# Altium PCB science_board_25.PcbDoc (part 1 of 2)
Units mil, origin at the board's own origin, x right, y up, seen from the top; angles counter-clockwise.
Board outline 2750 x 2600 mil, 2 copper layers (Top Layer, Bottom Layer); 141 components, 77 nets, 416 pads, 107 vias.
Unrouted connection lines stored in the file: 96.
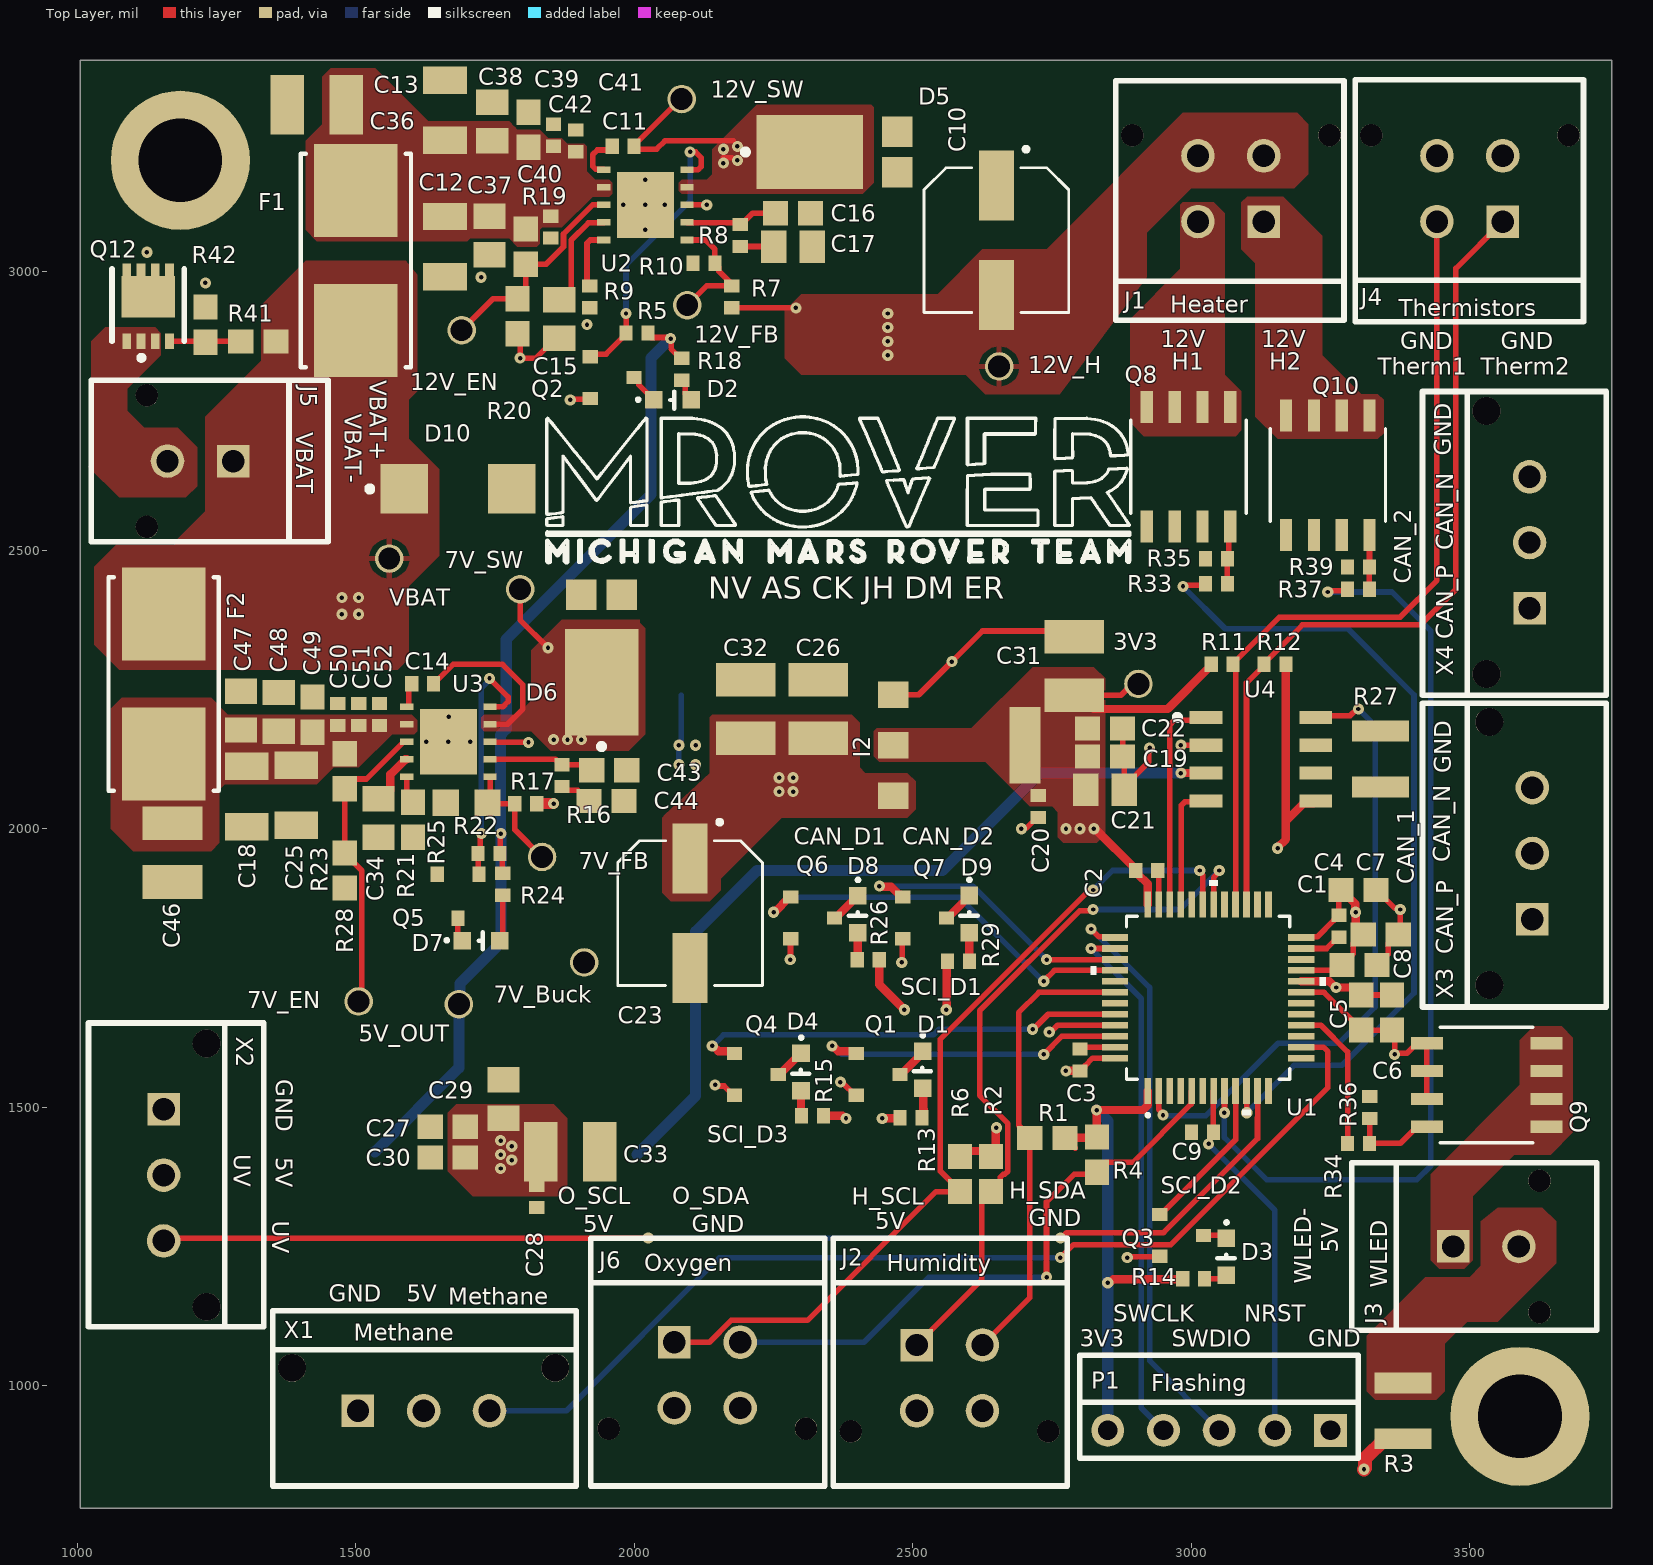
[diagram p0: Top Layer view]
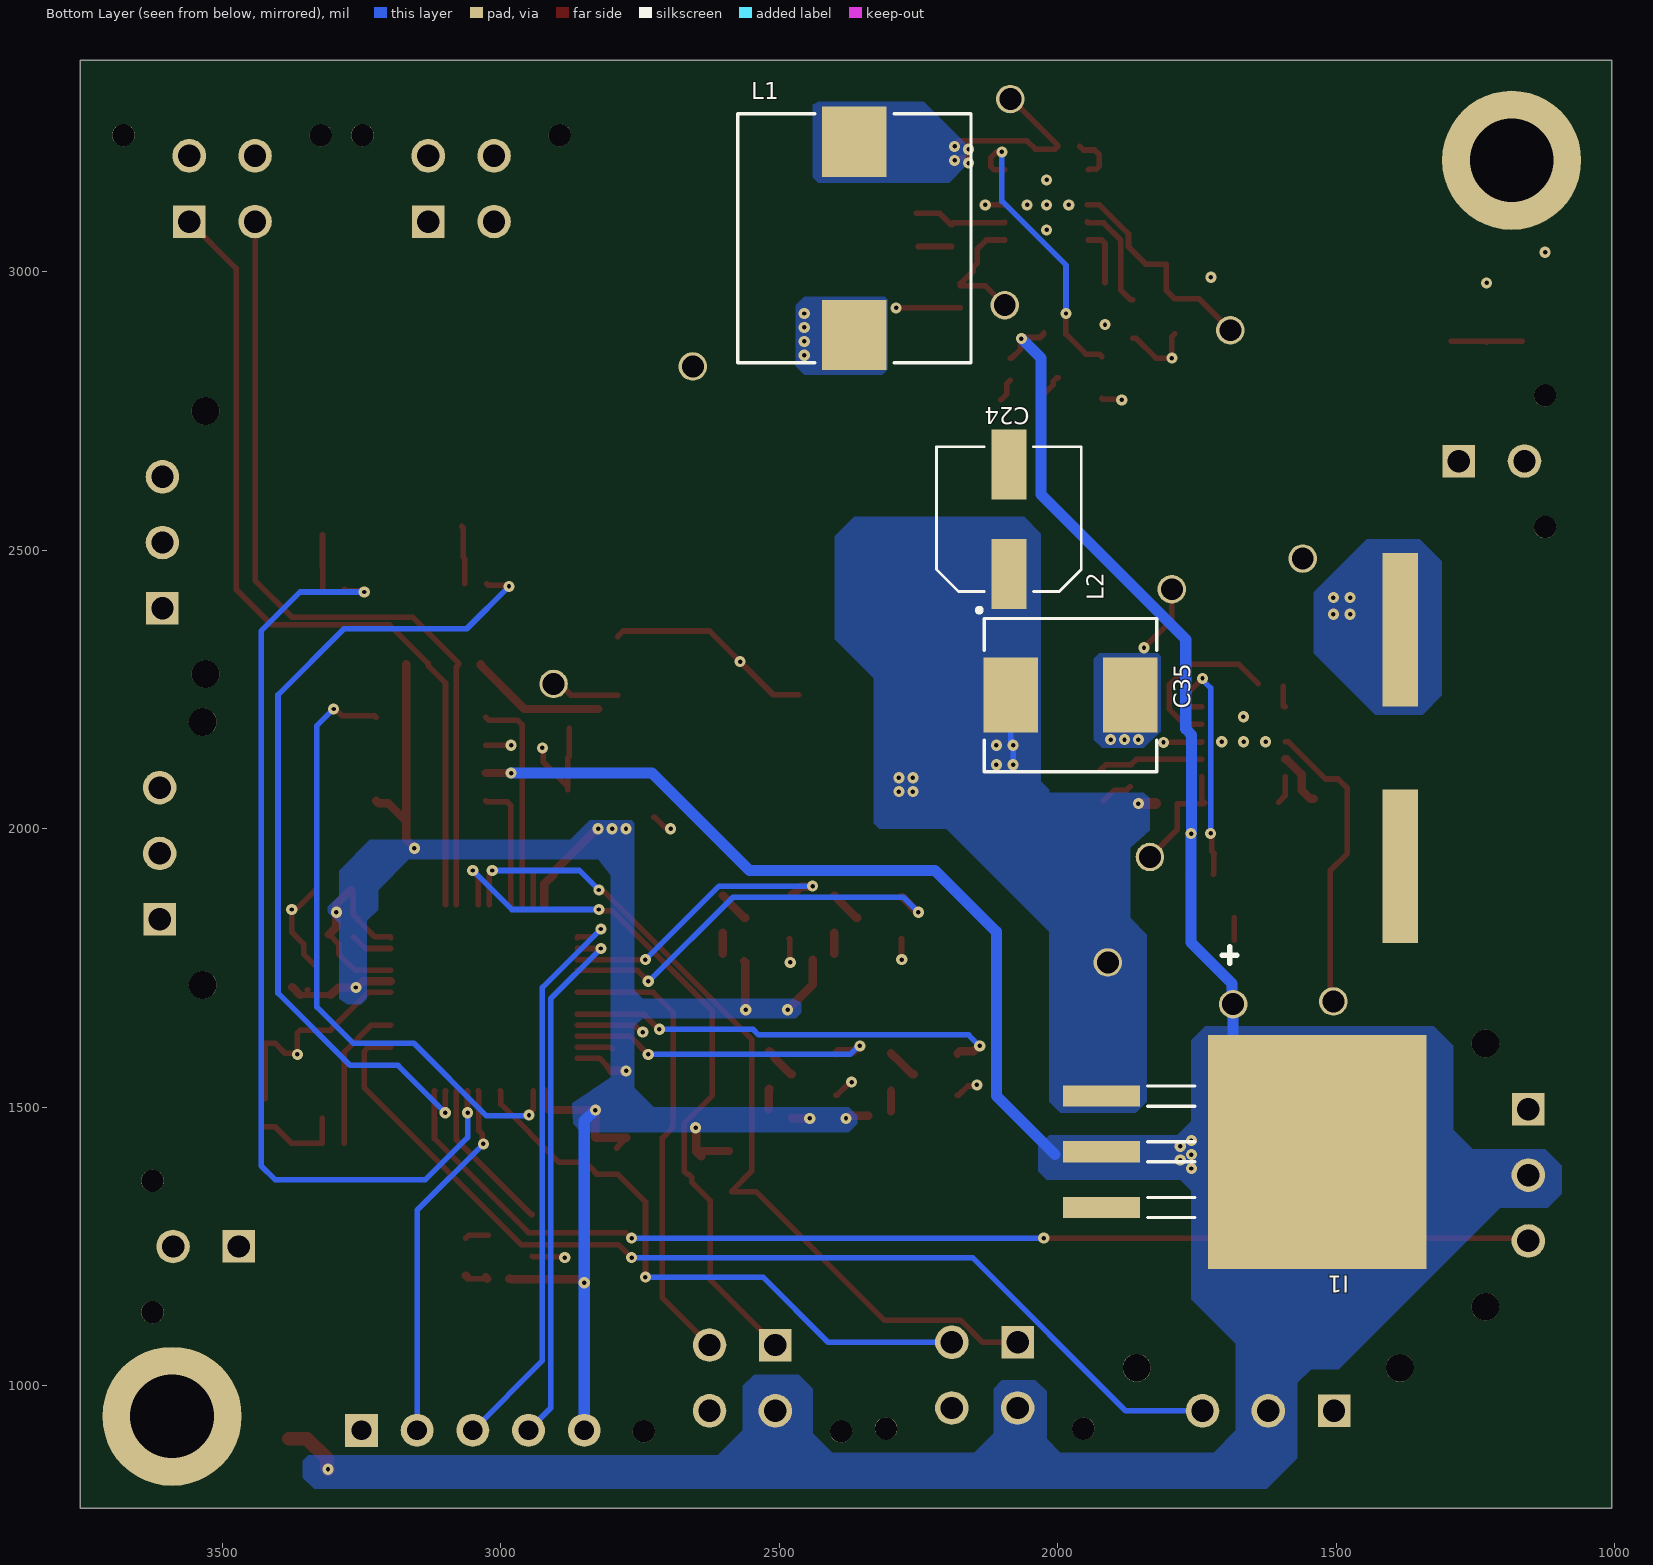
[diagram p1: Bottom Layer view, seen from below]

## Layer stack, top to bottom
Top Solder: solder mask 0.4, Solder Resist, Dk 3.5
Top Layer: signal copper 1.4
Dielectric 1: dielectric 12.6, FR-4, Dk 4.8
Bottom Layer: signal copper 1.4
Bottom Solder: solder mask 0.4, Solder Resist, Dk 3.5

## Board outline
1005,780 1005,3380 3755,3380 3755,780

## Design rules (kind name [scope] priority, off if disabled: settings)
BoardOutlineClearance [All] p1: gap=7.87 ignorepadtopadclearanceinfootprint=FALSE
Clearance [All] p1: gap=4 ignorepadtopadclearanceinfootprint=FALSE except(5: Arc-Via Track-Via SMDPad-Via THPad-Via Via-Via Via-Fill Via-Poly Via-Region Via-Text; 9.84: Arc-Hole Track-Hole SMDPad-Hole THPad-Hole Via-Hole Fill-Hole Poly-Hole Region-Hole Text-Hole)
ComponentClearance [All] p1: gap=4 collisioncheckmode=3 verticalgap=4 showdistances=TRUE
DiffPairsRouting DiffPairsRouting_1 [InDifferentialPair ('CAN')] p1: maxlimit=10 minlimit=10 mostfreqgap=10 toplayer_minwidth=15 toplayer_maxwidth=15 toplayer_prefwidth=15 bottomlayer_minwidth=15 bottomlayer_maxwidth=15 bottomlayer_prefwidth=15 maxuncoupledlength=500
DiffPairsRouting [All] p2: maxlimit=4 minlimit=4 mostfreqgap=4 toplayer_minwidth=4 toplayer_maxwidth=71497.94 toplayer_prefwidth=4 bottomlayer_minwidth=4 bottomlayer_maxwidth=71497.94 bottomlayer_prefwidth=4 maxuncoupledlength=500
Height [All] p1: minheight=0 maxheight=71497.94 prefheight=500
HoleSize [All] p1: absolutevalues=TRUE maxlimit=248.03 minlimit=7.87 maxpercent=80.000 minpercent=20.000
HoleToHoleClearance [All] p1: gap=9.84 allowstackedmicrovias=FALSE
MatchedLengths [InDifferentialPair ('CAN')] p1: tolerance=1000 checknetsindiffpair=FALSE checkdiffpairvsdiffpair=TRUE checkxsignals=TRUE checkothers=TRUE
MinimumAnnularRing [All] p1: minimumring=3
MinimumSolderMaskSliver [All] p1: minsoldermaskwidth=0
PlaneClearance [All] p1: clearance=4
PlaneConnect PlaneConnectPowerPads [InPadClass('PowerPads')] p1: planeconnectstyle=Direct reliefexpansion=20 reliefentries=4 reliefconductorwidth=10 reliefairgap=10
PlaneConnect [All] p2: pad.planeconnectstyle=Relief pad.reliefexpansion=11.81 pad.reliefentries=4 pad.reliefconductorwidth=4 pad.reliefairgap=4 via.planeconnectstyle=Direct via.reliefexpansion=11.81 via.reliefentries=4 via.reliefconductorwidth=5 via.reliefairgap=5
PolygonConnect PolygonConnectPowerPads [All vs (InPadClass('PowerPads'))] p1: connectstyle=Direct reliefconductorwidth=10 reliefentries=4 polygonreliefangle="90 Angle" airgapwidth=10
PolygonConnect [All] p2: connectstyle=Direct reliefconductorwidth=4 reliefentries=4 polygonreliefangle="90 Angle" airgapwidth=4
RoutingVias [All] p1: holewidth=7.87 width=17.72 viastyle="Through Hole" minholewidth=7.87 minwidth=17.72 maxholewidth=248.03 maxwidth=257.87
SilkToSilkClearance [All] p1: silktosilkclearance=0
SilkToSolderMaskClearance [IsPad] p1: minsilkscreentomaskgap=4 clearancetoexposedcopper=TRUE
SolderMaskExpansion [All] p1: expansion=2.95 istentingtop=FALSE
SupplyNets "Schematic Supply Nets_11" [InNet('12V_HEATER')] p1: voltage=0.000
SupplyNets "Schematic Supply Nets_10" [InNet('VBAT_LDOS')] p2: voltage=0.000
SupplyNets "Schematic Supply Nets_9" [InNet('5V')] p3: voltage=0.000
SupplyNets "Schematic Supply Nets_8" [InNet('VBAT_12V')] p4: voltage=0.000
SupplyNets "Schematic Supply Nets_7" [InNet('7V_BUCK')] p5: voltage=0.000
SupplyNets "Schematic Supply Nets_6" [InNet('12V_HEATER')] p6: voltage=0.000
SupplyNets "Schematic Supply Nets_5" [InNet('3V3')] p7: voltage=0.000
SupplyNets "Schematic Supply Nets_4" [InNet('GND')] p8: voltage=0.000
SupplyNets "Schematic Supply Nets_3" [InNet('3V3_OUT')] p9: voltage=0.000
SupplyNets "Schematic Supply Nets_2" [InNet('5V')] p10: voltage=0.000
SupplyNets "Schematic Supply Nets_1" [InNet('VBAT')] p11: voltage=0.000
SupplyNets "Schematic Supply Nets" [InNet('5V_OUT')] p12: voltage=0.000
Width [All] p1: maxlimit=71497.94 minlimit=4 preferedwidth=4
20 further rules are at their usual default settings.

## Classes and differential pairs
component class U_MCU_breakout: C1 C2 C3 C4 C5 C6 C7 C8 C9 P1 R1 R2 R4 R6 U1
component class U_Input_Power: C35 C36 C37 C38 C39 C40 C41 C42 C46 C47 C48 C49 C50 C51 C52 D10 F1 F2 J5 Q12 R41 R42 TP11
component class U_Headers: J1 J2 J3 J4 J6 Q8 Q9 Q10 R3 R11 R12 R33 R34 R35 R36 R37 R39 X1 X2
component class U_CAN_Transceiver: D1 D3 D4 D8 D9 Q1 Q3 Q4 Q6 Q7 R13 R14 R15 R26 R27 R29 U4 X3 X4
component class U_12V_Buck_Motor: C10 C11 C12 C13 C15 C16 C17 D2 D5 L1 Q2 R5 R7 R8 R9 R10 R18 R19 R20 TP1 TP2 TP3 TP4 U2
component class U_7V_5V_3V3_Bucks: C14 C18 C19 C20 C21 C22 C23 C24 C25 C26 C27 C28 C29 C30 C31 C32 C33 C34 C43 C44 D6 D7 I1 I2 L2 Q5 R16 R17 R21 R22 R23 R24 R25 R28 TP5 TP6 TP7 TP8 TP9 TP10 U3
differential pair CAN: +CAN_P -CAN_N

## Components (designator, comment, footprint, x,y, rotation, side; value= is the part's Value field where it differs from the comment)
3V3 "5003" TEST-POINT-0001 2905,2260 r0 top (schematic designator TP7)
5V_OUT "5003" TEST-POINT-0001 1685,1685 r0 top (schematic designator TP6)
7V_Buck "5003" TEST-POINT-0001 1910,1760 r0 top (schematic designator TP5)
7V_EN "5003" TEST-POINT-0001 1505,1690 r0 top (schematic designator TP8)
7V_FB "5003" TEST-POINT-0001 1834.32,1949.28 r90 top (schematic designator TP10)
7V_SW "5003" TEST-POINT-0001 1795,2430 r0 top (schematic designator TP9)
12V_EN "5003" TEST-POINT-0001 1690,2895 r0 top (schematic designator TP2)
12V_FB "5003" TEST-POINT-0001 2095,2940 r0 top (schematic designator TP4)
12V_H "5003" TEST-POINT-0001 2655,2830 r0 top (schematic designator TP1)
12V_SW "5003" TEST-POINT-0001 2085,3310 r0 top (schematic designator TP3)
C1 "CC0402KRX7R7BB104" CAP-0402 3265,1825 r90 top
C2 "CC0402KRX7R7BB104" CAP-0402 2920,1925 r180 top
C3 "CC0402KRX7R7BB104" CAP-0402 2800,1585 r270 top
C4 "CC0603KRX5R8BB475" CAP-0603 3300,1890 r0 top
C5 "CC0603KPX7R9BB103" CAP-0603 3305,1670 r90 top
C6 "CC0603KRX7R7BB105" CAP-0603 3360,1670 r90 top
C7 "CC0603KPX7R9BB103" CAP-0603 3302.05,1755.47 r180 top
C8 "CC0603KRX7R7BB105" CAP-0603 3340,1810 r180 top
C9 "CC0402KRX7R7BB104" CAP-0402 3020,1455 r180 top
C10 "EEH-ZC1V470P" CAP-Radial-SMD 2650,3056.57 r270 top
C11 "CC0402KRX7R7BB104" CAP-0402 1980,3225 r0 top
C12 "CC1206KKX7R0BB225" CAP-1206 1660,3045 r90 top
C13 "CC1206KKX7R0BB225" CAP-1206 1660,3290 r270 top
C14 "CC0402KRX7R7BB104" CAP-0402 1620,2260 r0 top
C15 "GRM2165C1H272JA01D" CAP-0805 1865,2915 r90 top
C16 "CC0603CRNPO0BN6R8" CAP-0603 2285,3105 r180 top
C17 "CC0805JRNPO9BN471" CAP-0805 2285,3045 r180 top
C18 "CC1206KKX7R0BB225" CAP-1206 1304.28,2057.95 r90 top
C19 "CC0603KRX5R6BB106" CAP-0603 2845,2130 r180 top
C20 "CC0402KRX7R7BB104" CAP-0402 2725,2040 r90 top
C21 "CC0805JRNPO9BN471" CAP-0805 2845,2070 r180 top
C22 "CC0603KRX7R0BB104" CAP-0603 2845,2180 r180 top
C23 "EEH-ZC1V470P" CAP-Radial-SMD 2100,1848.43 r270 top
C24 "EEH-ZC1V470P" CAP-Radial-SMD 2087.6,2555.76 r90 bottom
C25 "CC1206KKX7R0BB225" CAP-1206 1392.92,2060.07 r90 top
C26 "293D106X9016A2TE3" CAP-1210 2330,2215 r270 top
C27 "CC0603KRX5R6BB106" CAP-0603 1665,1465 r0 top
C28 "CC0402KRX7R7BB104" CAP-0402 1825,1339.68 r90 top
C29 "CC0805JRNPO9BN471" CAP-0805 1765,1515 r270 top
C30 "CC0603KRX7R0BB104" CAP-0603 1665,1410 r0 top
C31 "293D106X9016A2TE3" CAP-1210 2790,2292.2 r270 top
C32 "293D106X9016A2TE3" CAP-1210 2200,2215 r270 top
C33 "293D106X9016A2TE3" CAP-1210 1885,1420 r180 top
C34 "GRM2165C1H272JA01D" CAP-0805 1540.5,2019.43 r90 top
C35 "100SEV100M12.5X16" ELEC-100U-0001 1385,2145 r0 bottom
C36 "CL32B106KBJNNNE" CAP-1210 1430,3300 r0 top
C37 "CC0805KKX7R9BB105" CAP-0805 1740,3065 r90 top
C38 "CC0805KRX7R9BB104" CAP-0805 1745,3270 r270 top
C39 "CC0603KPX7R9BB103" CAP-0603 1810,3255 r270 top
C40 "CC0402KRX7R9BB102" CAP-0402 1850,3080 r90 top
C41 "CC0402JRNPO9BN101" CAP-0402 1895,3235 r270 top
C42 "CC0402JRNPO9BN100" CAP-0402 1855,3245 r270 top
C43 "CC0603CRNPO0BN6R8" CAP-0603 1955,2105 r180 top
C44 "GRM1885C1H302JA01D" CAP-0603 1950,2050 r0 top
C46 "CL32B106KBJNNNE" CAP-1210 1170.94,1957.2 r90 top
C47 "CC0805KKX7R9BB105" CAP-0805 1293.84,2211.93 r270 top
C48 "CC0805KRX7R9BB104" CAP-0805 1361.62,2209.95 r270 top
C49 "CC0603KPX7R9BB103" CAP-0603 1422.12,2204.82 r270 top
C50 "CC0402KRX7R9BB102" CAP-0402 1467.46,2205.08 r270 top
C51 "CC0402JRNPO9BN101" CAP-0402 1504.92,2204.91 r270 top
C52 "CC0402JRNPO9BN100" CAP-0402 1542.39,2205.02 r270 top
D1 "BL-HKC36G-AV-TRB" LED-0603 2487.99,1623.95 r270 top
D2 "BL-HKC36G-AV-TRB" LED-0603 2011.81,2740.43 r0 top
D3 "BL-HKC36G-AV-TRB" LED-0603 3033.06,1288.19 r270 top
D4 "BL-HKC36G-AV-TRB" LED-0603 2269.67,1620.03 r270 top
D5 "PDS760-13" DO-POWERDI5 2359.33,3215 r180 top
D6 "PDS760-13" DO-POWERDI5 1941.22,2307.56 r270 top
D7 "BL-HKC36G-AV-TRB" LED-0603 1668.14,1769.69 r0 top
D8 "BL-HKC36G-AV-TRB" LED-0603 2371.52,1903.19 r270 top
D9 "BL-HKC36G-AV-TRB" LED-0603 2571.62,1903.35 r270 top
D10 "SMBJ40CA" "DO-214AA (SMBJ)" 1685,2610 r180 top
F1 "01550900M" FUSE-0001 1500,3020 r90 top
F2 "01550900M" FUSE-0001 1155,2260 r270 top
I1 "LM1085ISX-5.0NOPB" IC-TO-263-4 1540,1420 r270 bottom
I2 "LM1117IMPX-3.3/NOPB" IC-SOT-223-4 2583.11,2150 r0 top
J1 "Molex 43045-0412" CONN-4POS-0002 3070.94,3090 r0 top
J2 "Molex 43045-0412" CONN-4POS-0002 2565.94,1073.11 r180 top
J3 "0430450212" CONN-2POS-0001 3470,1250 r270 top
J4 "Molex 43045-0412" CONN-4POS-0002 3500,3090 r0 top
J5 "0430450212" CONN-2POS-0001 1280,2660 r90 top
J6 "Molex 43045-0412" CONN-4POS-0002 2130.94,1078.11 r180 top
L1 "BMRF001010401R0MD1" IND-10UH-0001 2365,3060 r270 bottom
L2 "IHLP2525CZER8R2M01" IND25X25CZ 1977,2240 r0 bottom
P1 "Header 5" HDR1X5 3250,920 r180 top
Q1 "T2N7002AK,LM" IC-SOT23-3 2437.46,1559.04 r270 top
Q2 "T2N7002AK,LM" IC-SOT23-3 1960,2810 r270 top
Q3 "T2N7002AK,LM" IC-SOT23-3 2982.53,1270 r270 top
Q4 "T2N7002AK,LM" IC-SOT23-3 2219.14,1558.92 r270 top
Q5 "T2N7002AK,LM" IC-SOT23-3 1683.43,1878.75 r180 top
Q6 "T2N7002AK,LM" IC-SOT23-3 2320,1840 r270 top
Q7 "T2N7002AK,LM" IC-SOT23-3 2521.1,1840 r270 top
Q8 "SI4838BDY-T1-GE3" SOIC8_NARROW_VIS 2995,2650 r90 top
Q9 "SI4838BDY-T1-GE3" SOIC8_NARROW_VIS 3530,1540 r0 top
Q10 "SI4838BDY-T1-GE3" SOIC8_NARROW_VIS 3245,2635 r90 top
Q12 "CSD18543Q3AT" IC-8VSONCLIP 1054.88,2840.47 r0 top
R1 "RC0603FR-074K7L" RES-0603 2741.5,1445 r0 top
R2 "RC0603FR-074K7L" RES-0603 2640,1380 r90 top
R3 "RC1210FR-07120RL" RES-1210 3380,955 r270 top
R4 "RC0603FR-074K7L" RES-0603 2830.69,1414.9 r90 top
R5 "RC0402FR-071KL" RES-0402 2005,2890 r0 top
R6 "RC0603FR-074K7L" RES-0603 2585,1380 r90 top
R7 "RC0402FR-07147KL" RES-0402 2175,2955 r270 top
R8 "RC0402FR-0760K4L" RES-0402 2190,3065 r90 top
R9 "RC0402FR-07158KL" RES-0402 1920,2955 r90 top
R10 "RC0402FR-0710K5L" RES-0402 2125,3015 r0 top
R11 "RC0402FR-0710K5L" RES-0402 3055.32,2295 r180 top
R12 "RC0402FR-0710K5L" RES-0402 3150,2295 r0 top
R13 "RC0402FR-07100RL" RES-0402 2496.71,1480.83 r180 top
R14 "RC0402FR-07100RL" RES-0402 3004.18,1191.78 r180 top
R15 "RC0402FR-07100RL" RES-0402 2320,1485 r0 top
R16 "RC0402FR-0780K6L" RES-0402 1805,2045 r180 top
R17 "RC0402FR-0736K5L" RES-0402 1870,2095.32 r90 top
R18 "RC0402FR-07240RL" RES-0402 2085,2825 r90 top
R19 "RC0603FR-072M15L" RES-0603 1805,3045 r90 top
R20 "RC0603FR-07100KL" RES-0603 1790,2920 r90 top
R21 "RTT021783FTH" RES-0603 1602.95,2016.22 r90 top
R22 "RT0805BRD0710K4L" RES-0805 1699,2046.74 r180 top
R23 "RC0603FR-072M15L" RES-0603 1480,2103.17 r90 top
R24 "RC0402FR-07240RL" RES-0402 1763.59,1900.41 r270 top
R25 "RC0402FR-0710K5L" RES-0402 1738.84,1955.59 r0 top
R26 "RC0402FR-07100RL" RES-0402 2420,1765 r0 top
R27 "RC1210FR-07120RL" RES-1210 3340,2125 r270 top
R28 "RC0603FR-07100KL" RES-0603 1480,1925 r90 top
R29 "RC0402FR-07100RL" RES-0402 2582.04,1761.79 r180 top
R33 "RC0402FR-07100RL" RES-0402 3045,2440 r0 top
R34 "RC0402FR-07100RL" RES-0402 3300.32,1435 r0 top
R35 "RC0402FR-7W33RL" RES-0402 3045,2485 r180 top
R36 "RC0402FR-7W33RL" RES-0402 3320,1499.68 r90 top
R37 "RC0402FR-07100RL" RES-0402 3300,2430 r0 top
R39 "RC0402FR-7W33RL" RES-0402 3300,2470 r180 top
R41 "RC0603FR-07200KL" RES-0603 1325,2875 r180 top
R42 "RC0603FR-07100KL" RES-0603 1230,2905 r90 top
U1 "STM32G431CBT6" IC-LQFP48 3030.14,1696.45 r90 top
U2 "TPS54561DPRR" IC-10WSON 2020,3120 r0 top
U3 "TPS54561DPRR" IC-10WSON 1666.29,2156.05 r0 top
U4 "TCAN1044VDRQ1" IC-8SOIC 3125,2125 r270 top
VBAT "5003" TEST-POINT-0001 1560,2485 r90 top (schematic designator TP11)
X1 "Molex 43650-0315" 43650-0315 1621.89,955 r180 top
X2 "Molex 43650-0315" 43650-0315 1155,1378.11 r90 top
X3 "Molex 43650-0315" 43650-0315 3612.17,1955.67 r270 top
X4 "Molex 43650-0315" 43650-0315 3607.17,2513.78 r270 top

## Footprints (in the part's own frame and the unit in brackets; to place one, negate y for a bottom-side part, rotate by r counter-clockwise, add the part's x,y. Pads: shape width x height; smd on the part's side, far side on the other; paste and mask are expansions set on the pad)
43650-0315 [mm]
  round 1.27 hole 1.27 unplated: 1(-6,-1.96) 1(6,-1.96)
  rect 1.482x1.482 / inner rect 1.524x1.524 / far side rect 1.482x1.482 hole 1.02: P$1(3,0)
  round 1.53 / inner round 1.524 / far side round 1.53 hole 1.02: P$2(0,0) P$3(-3,0)
  body extent -6.32,-2.47 6.33,3.14, height 10.03
CAP-0402 [mm]
  rect 0.6x0.7 smd: 1(-0.5,0) 2(0.5,0)
  body extent -0.5,-0.22 0.5,0.23, height 0.5
CAP-0603 [mm]
  rect 1.15x1.1 smd: 1(-0.8,0) 2(0.8,0)
  body extent -0.8,-0.45 0.8,0.45, height 0.8
CAP-0805 [mm]
  rect 1.16x1.47 smd: 1(-0.88,0) 2(0.88,0)
  body extent -1,-0.63 1,0.63, height 0.94
CAP-1206 [mm]
  rect 1.25x2 smd: 1(-1.375,0) 2(1.375,0)
  body extent -1.6,-0.8 1.6,0.8, height 1.5
CAP-1210 [mm]
  rect 1.53x2.72 smd: 1(-1.341,0) 2(1.341,0)
  body extent -1.6,-1.25 1.6,1.25, height 2.7
CAP-Radial-SMD [mm]
  rect 3.2x1.6 smd: 1(-2.5,0) 2(2.5,0)
  silkscreen extent -4.25,-3.3 3.3,3.3, body extent -3.65,-3.3 3.65,3.3, height 5.8
CONN-2POS-0001 [mm]
  round 1.02 hole 1.02 unplated: 1(-3,3.94) 1(3,3.94)
  rect 1.482x1.482 / inner rect 1.524x1.524 / far side rect 1.482x1.482 hole 1.02: 1(0,0)
  round 1.53 / inner round 1.524 / far side round 1.53 hole 1.02: 2(0,3)
  body extent -3.57,-2.42 3.57,6.35, height 9.91
CONN-4POS-0002 [mm]
  round 1.02 hole 1.02 unplated: 1(-4.5,3.94) 1(4.5,3.94)
  rect 1.482x1.482 / inner rect 1.524x1.524 / far side rect 1.482x1.482 hole 1.02: 1(1.5,0)
  round 1.53 / inner round 1.524 / far side round 1.53 hole 1.02: 2(-1.5,0) 3(1.5,3) 4(-1.5,3)
  body extent -5.07,-2.45 5.08,6.32, height 10.03
"DO-214AA (SMBJ)" [mm]
  rect 2.16x2.26 smd: 1(-2.416,0) 2(2.484,0)
  silkscreen extent 3.94,-0.12 4.19,0.12, body extent -2.72,-1.95 2.78,1.95, height 2.45
DO-POWERDI5 [mm] "SMD, 3-Leads, Body 3.975x5.375mm, Pitch 1.84mm"
  rect 1.4x1.39 smd: 1(-2.856,-0.92) 1(-2.856,0.92)
  rect 4.86x3.36 smd: 2(1.126,0)
  silkscreen extent 3.94,-0.12 4.19,0.12, body extent -3.25,-1.98 3.25,1.98, height 1.15
ELEC-100U-0001 [mm]
  rect 1.6x7 smd: 1(0,5.4) 2(0,-5.4)
  silkscreen extent 7.45,9.08 8.13,9.82, body extent -6.6,-7.15 6.6,7.15, height 16.56
FUSE-0001 [mil]
  rect 167x150 smd paste+0 mask+0: 1(-125.5,0) 2(125.5,0)
  silkscreen extent -192,-99 192,99, body extent -213,-103 213,103, height 10
HDR1X5 [mm] "Connector; Header; 5 Position"
  rect 1.5x1.5 hole 0.9: 1(0,0)
  round 1.5 hole 0.9: 2(2.54,0) 3(5.08,0) 4(7.62,0) 5(10.16,0)
  silkscreen extent -1.27,-1.27 11.43,1.27
IC-8SOIC [mm]
  rect 0.6x1.5 smd: 1(-1.905,-2.5) 2(-0.635,-2.5) 3(0.635,-2.5) 4(1.905,-2.5) 5(1.905,2.5) 6(0.635,2.5) 7(-0.635,2.5) 8(-1.905,2.5)
  silkscreen extent -2.03,-3.93 -1.78,-3.68, body extent -2.45,-3 2.45,3, height 1.75
IC-8VSONCLIP [mm]
  rect 0.4x0.7 smd paste-100 mask+0.05: 1(2.812,0.877) 2(0.862,0.877) 2(1.512,0.877) 2(2.162,0.877) 3(0.862,4.077) 3(1.512,4.077) 3(2.162,4.077) 3(2.812,4.077)
  rect 2.45x1.9 smd paste-100 mask+0.05: 3(1.837,2.917)
  silkscreen extent 0.19,0.03 3.49,4.18, body extent 0.18,0.89 3.48,4.19, height 1.1
IC-10WSON [mm]
  rect 0.6x0.3 smd: 1(-1.9,1.6) 2(-1.9,0.8) 3(-1.9,0) 4(-1.9,-0.8) 5(-1.9,-1.6) 6(1.9,-1.6) 7(1.9,-0.8) 8(1.9,0) 9(1.9,0.8) 10(1.9,1.6)
  rect 2.6x3 smd: 11(0,0)
  body extent -2,-2 2,2, height 0.8
IC-LQFP48 [mil]
  rect 47x12 smd paste+0 mask+0: 1(-167.32,108.27) 2(-167.32,88.58) 3(-167.32,68.9) 4(-167.32,49.21) 5(-167.32,29.53) 6(-167.32,9.84) 7(-167.32,-9.84) 8(-167.32,-29.53) 9(-167.32,-49.21) 10(-167.32,-68.9) 11(-167.32,-88.58) 12(-167.32,-108.27) 25(167.32,-108.27) 26(167.32,-88.58) 27(167.32,-68.9) 28(167.32,-49.21) 29(167.32,-29.53) 30(167.32,-9.84) 31(167.32,9.84) 32(167.32,29.53) 33(167.32,49.21) 34(167.32,68.9) 35(167.32,88.58) 36(167.32,108.27)
  rect 12x47 smd paste+0 mask+0: 13(-108.27,-167.32) 14(-88.58,-167.32) 15(-68.9,-167.32) 16(-49.21,-167.32) 17(-29.53,-167.32) 18(-9.84,-167.32) 19(9.84,-167.32) 20(29.53,-167.32) 21(49.21,-167.32) 22(68.9,-167.32) 23(88.58,-167.32) 24(108.27,-167.32) 37(108.27,167.32) 38(88.58,167.32) 39(68.9,167.32) 40(49.21,167.32) 41(29.53,167.32) 42(9.84,167.32) 43(-9.84,167.32) 44(-29.53,167.32) 45(-49.21,167.32) 46(-68.9,167.32) 47(-88.58,167.32) 48(-108.27,167.32)
  silkscreen extent -214,-211 211,211, body extent -177,-177 177,177, height 63
IC-SOT23-3 [mm]
  rect 0.6x0.7 smd: 1(-0.95,-1) 2(0.95,-1) 3(0,1)
  body extent -1.46,-1.18 1.46,1.19, height 1.12
IC-SOT-223-4 [mm]
  rect 1.4x1.2 smd mask+0.07: 1(-3,2.3) 3(-3,-2.3) 4(-3,0)
  rect 1.4x3.5 smd: 2(3,0)
  body extent -3.5,-3.25 3.5,3.25, height 1.68
IC-TO-263-4 [mil]
  rect 38x138 smd paste-69 mask-69: 1(-100,-381) 2(0,-381) 3(100,-381)
  rect 420x392 smd paste-210 mask-210: 4(0,6)
  silkscreen extent -118,-298 118,-214, body extent -210,-365 210,118, height 67
IND25X25CZ [mil] "7v Buck"
  rect 98x135 smd paste-67.5 mask-67.5: 1(-107,0) 2(107,0)
  silkscreen extent -155,-138 155,138, body extent -150,-133 150,133, height 118
IND-10UH-0001 [mil]
  rect 126x116 smd paste+0 mask+0: 1(-173.5,0) 2(173.5,0)
  silkscreen extent -224,-210 224,210, body extent -229,-204 229,204, height 157
LED-0603 [mm]
  rect 0.8x0.8 smd: 1(2.291,0.751) 2(0.589,0.751)
  silkscreen extent -0.2,0.34 1.52,1.13, body extent 0.65,0.36 2.25,1.16, height 0.39
RES-0402 [mm]
  rect 0.6x0.7 smd: 1(-0.5,0) 2(0.5,0)
  body extent -0.5,-0.25 0.5,0.25, height 0.3
RES-0603 [mm]
  rect 1.15x1.1 smd: 1(-0.8,0) 2(0.8,0)
  body extent -0.8,-0.4 0.8,0.4, height 0.43
RES-0805 [mm]
  rect 1.2x1.2 smd: 1(-0.95,0) 2(0.95,0)
  body extent -1,-0.6 1,0.6, height 0.71
RES-1210 [mm] "Chip Resistor, 2-Leads, Body 3.10x2.60mm, IPC High Density"
  rect 0.95x2.6 smd: 1(-1.275,0) 2(1.275,0)
  body extent -1.6,-1.35 1.6,1.35, height 0.6
SOIC8_NARROW_VIS [mil]
  rect 57.5x22 smd paste+0 mask+0: 1(-107.25,-75) 2(-107.25,-25) 2(-107.25,25) 2(-107.25,75) 3(107.25,-75) 3(107.25,-25) 3(107.25,25) 3(107.25,75)
  silkscreen extent -84,-104 84,104, body extent -122,-99 122,99, height 69
TEST-POINT-0001 [mm] "2024 miniature test point"
  round 1.3 hole 1: 1(0,0)
  body extent -1.27,-1.27 1.27,1.27, height 4.57

## Part data
3V3 5V_OUT 7V_Buck 7V_EN 7V_FB 7V_SW 12V_EN 12V_FB 12V_H 12V_SW VBAT: library part TEST-POINT-0001, "Oranange PC Test Point, Miniature Phoisphor Bronze Silver Plating Through Hole Mounting Type"
C1 C2 C3 C9 C11 C14 C20 C28: library part CAP-0.1U-0001, "CAP CER 0.1UF 16V X7R 0402", Capacitance="100 nF", Voltage Rating="16 V", ComponentLink2Description=Datasheet, ComponentLink2URL=https://www.yageo.com/upload/media/product/productsearch/datasheet/mlcc/UPY-GPHC_X7R_6.3V-to-250V_24.pdf, Device Class=Ceramic, Size=0402
C4: library part CAP-4.7U-0001, "CAP CER 4.7UF 25V X5R 0603", Capacitance="4.7 uF", Voltage=25V, Device Class=Ceramic, Size=0603
C5 C7 C39 C49: library part CAP-10N-0002, "CAP CER 10000PF 50V X7R 0603", Capacitance="10 nF", Voltage="50 V", ComponentLink2Description=Datasheet, ComponentLink2URL=http://www.yageo.com/documents/recent/UPY-GPHC_X7R_6.3V-to-50V_18.pdf, Device Class=Ceramic, Size=0603
C6 C8: library part CAP-1U-0002, "CAP CER 1UF 16V X7R 0603", Capacitance="1.0 uF", Voltage=16V, Device Class=Ceramic, Size=0603
C10 C23 C24: library part CAP-47U-0002, "CAP ALUM HYBRID 47UF 20% 35V SMD", Capacitance="47 uF", Voltage=35V, ComponentLink1Description=Datasheet, ComponentLink1URL=https://industrial.panasonic.com/cdbs/www-data/pdf/RDD0000/ABA0000C1234.pdf, Device Class=Electrolytic
C12 C13 C18 C25: library part CAP-2.2U-0001, "CAP CER 2.2UF 100V X7R 1206", Capacitance=2.2uF, Voltage=100V, ComponentLink1Description=Datasheet, ComponentLink1URL=https://www.yageo.com/upload/media/product/productsearch/datasheet/mlcc/UPY-GPHC_X7R_6.3V-to-250V_24.pdf, Device Class=Ceramic, Size=1206
C15 C34: library part CAP-2.7N-0001, "CAP CER 2700PF 50V C0G/NP0 0805", Capacitance=2.7nF, Voltage=50V, ComponentLink1Description=Datasheet, ComponentLink1URL=https://search.murata.co.jp/Ceramy/image/img/A01X/G101/ENG/GRM2165C1H272JA01-01.pdf, Device Class=Ceramic, Size=0805
C16 C43: library part CAP-6.8P-0001, "CAP CER 6.8PF 100V C0G/NPO 0603", Capacitance=6.8pF, Voltage=100V, ComponentLink1Description=Datasheet, ComponentLink1URL=https://www.yageo.com/upload/media/product/productsearch/datasheet/mlcc/UPY-GPHC_X7R_6.3V-to-250V_24.pdf, Device Class=Ceramic, Size=0603
C17 C21 C29: library part CAP-470P-0001, "CAP CER 470PF 50V C0G/NPO 0805", Capacitance="470 pF", Voltage=50V, ComponentLink1Description=Datasheet, ComponentLink1URL=https://www.yageo.com/upload/media/product/productsearch/datasheet/mlcc/UPY-GP_NP0_16V-to-50V_18.pdf, Device Class=Ceramic, Size=0805
C19 C27: library part CAP-10U-0001, "CAP CER 10UF 10V X5R 0603", Capacitance="10 uF", Voltage=10V, ComponentLink1Description=Datasheet, ComponentLink1URL=https://www.yageo.com/upload/media/product/app/datasheet/mlcc/upy-gphc_x5r_4v-to-50v.pdf, Device Class=Ceramic, Size=0603
C22 C30: library part CAP-100N-0001, "CAP CER 0.1UF 100V X7R 0603", Capacitance="100 nF", Voltage="100 V", ComponentLink1Description=Datasheet, ComponentLink1URL=https://www.yageo.com/upload/media/product/app/datasheet/mlcc/upy-np0x7r_mv_100-to-630v.pdf, Device Class=Ceramic, Size=0603
C26 C31 C32 C33: library part CAP-10U-0003_1, "CAP TANT 10UF 10% 16V 1206", Capacitance="10 uF", Voltage=16V, ComponentLink1Description=Datasheet, ComponentLink1URL=https://www.lcsc.com/datasheet/lcsc_datasheet_2304140030_Vishay-Intertech-293D106X9016A2TE3_C110038.pdf, Device Class=Tantalum, Size=1206
C35: library part CAP-100U-0002, "100 µF 100 V Aluminum Electrolytic Capacitors Radial, Can - SMD 2000 Hrs @ 85°C", Capacitance="100 uF", Voltage=100V, ComponentLink1Description=Datasheet, ComponentLink1URL=https://industrial.panasonic.com/cdbs/www-data/pdf/RDE0000/ABA0000C1190.pdf, Device Class=Electrolytic
C36 C46: library part CAP-10U-0002, "CAP CER 10UF 50V X7R 1210", Capacitance="10 uF", Voltage=50V, ComponentLink1Description=Datasheet, ComponentLink1URL=https://mm.digikey.com/Volume0/opasdata/d220001/medias/docus/41/CL32B106KBJNNNE_Spec.pdf, Device Class=Ceramic, Size=1210
C37 C47: library part CAP-1U-0001, "CAP CER 1UF 50V X7R 0805", Capacitance="1.0 uF", Voltage="50 V", ComponentLink2Description=Datasheet, ComponentLink2URL=https://www.yageo.com/upload/media/product/productsearch/datasheet/mlcc/UPY-GPHC_X7R_6.3V-to-250V_24.pdf, Device Class=Ceramic, Size=0805
C38 C48: library part CAP-0.1U-0002, "CAP CER 0.1UF 50V X7R 0805", Capacitance="100 nF", Voltage Rating="50 V", ComponentLink2Description=Datasheet, ComponentLink2URL=https://www.yageo.com/upload/media/product/productsearch/datasheet/mlcc/UPY-GPHC_X7R_6.3V-to-250V_24.pdf, Device Class=Ceramic, Size=0805
C40 C50: library part CAP-1N-0001, "CAP CER 1000PF 50V X7R 0402", Capacitance="1.0 nF", Voltage="50 V", ComponentLink2Description=Datasheet, ComponentLink2URL=http://www.yageo.com/documents/recent/UPY-GP_NP0_16V-to-50V_16.pdf, Device Class=Ceramic, Size=0402
C41 C51: library part CAP-100P-0001, "CAP CER 100PF 50V C0G/NPO 0402", Capacitance="100 pF", Voltage=50V, ComponentLink1Description=Datasheet, ComponentLink1URL=https://www.yageo.com/upload/media/product/productsearch/datasheet/mlcc/UPY-GP_NP0_16V-to-50V_18.pdf, Device Class=Ceramic, Size=0402
C42 C52: library part CAP-10P-0001, "CAP CER 10PF 50V C0G/NPO 0402", Capacitance="10 pF", Voltage=50V, ComponentLink1Description=Datasheet, ComponentLink1URL=https://www.yageo.com/upload/media/product/productsearch/datasheet/mlcc/UPY-GP_NP0_16V-to-50V_18.pdf, Device Class=Ceramic, Size=0402
C44: library part CAP-3N-0001, "3000 pF ±5% 50V Ceramic Capacitor C0G, NP0 0603 (1608 Metric)", Capacitance="3 nF", Voltage=50V, ComponentLink1Description=Datasheet, ComponentLink1URL=https://mm.digikey.com/Volume0/opasdata/d220001/medias/docus/41/CL32B106KBJNNNE_Spec.pdf, Device Class=Ceramic, Size=1210
D1 D2 D3 D4 D7 D8 D9: library part LED-0001, "LED YELLOW CLEAR 0603 SMD", Forward Current=30mA, Forward Voltage=2V, ComponentLink1Description=Datasheet, ComponentLink1URL=https://www.americanbrightled.com/pdffiles/led-components/smt/BL-HKC36G-AV-TRB.pdf
D5 D6: library part DIO-SCHOTTKY-0001, "DIODE SCHOTTKY 60V 7A POWERDI5", Forward Current=7A, Reverse Voltage (DC)=60V, ComponentLink1Description=Datasheet, ComponentLink1URL=https://www.diodes.com/assets/Datasheets/PDS760.pdf
D10: library part DIO-TVS-0001, "TVS DIODE 40VWM 64.5VC DO214AA", Current Rating=9.3A, Voltage Rating=64.5V, ComponentLink1Description=Datasheet, ComponentLink1URL=https://www.littelfuse.com/media?resourcetype=datasheets&itemid=09a6ae9a-73cb-4ac4-acac-e6dab92ab953&filename=littelfuse_tvs_diode_smbj_datasheet.pdf
F1 F2: library part FUSE-0001, "FUSE BLOK CARTRIDGE 125V 10A SMD", Fuse Current=8A, Voltage Rating=125V, ComponentLink2Description=Datasheet, ComponentLink2URL=https://www.littelfuse.com/~/media/electronics/datasheets/fuses/littelfuse_fuse_154_154t_154l_154tl_datasheet.pdf.pdf
I1: library part IC_LDO_5V_0002, "IC REG LIN 5V 3A DDPAK/TO263-3", Mfr_Name="Texas Instruments", ComponentLink1Description=Datasheet, ComponentLink1URL=https://www.ti.com/lit/ds/symlink/lm1085.pdf?HQS=dis-dk-null-digikeymode-dsf-pf-null-wwe&ts=1729859809163&ref_url=https%253A%252F%252Fwww.ti.com%252Fgeneral%252Fdocs%252Fsuppproductinfo.tsp%253FdistId%253D10%2526gotoUrl%253Dhttps%253A%252F%252Fwww.ti.com%252Flit%252Fgpn%252Flm1085, RefDes=RefDes, Type=Type
I2: library part IC_LDO_3V3_0001, "IC REG LIN 3.3V 800MA SOT223-4", ComponentLink1Description="New link", ComponentLink1URL=https://www.ti.com/lit/ds/symlink/lm1117.pdf?HQS=dis-dk-null-digikeymode-dsf-pf-null-wwe&ts=1721700739746
J1 J2 J4 J6: library part CONN-4POS-0002, "CONN HEADER VERT 4POS 3MM", ComponentLink1Description=Datasheet, ComponentLink1URL=https://www.molex.com/content/dam/molex/molex-dot-com/products/automated/en-us/salesdrawingpdf/430/43045/430450412_sd.pdf?inline
J3 J5: library part CONN-2POS-0001, "CONN HEADER VERT 2POS", ComponentLink1Description=Datasheet, ComponentLink1URL=https://tools.molex.com/pdm_docs/ps/PS-43045.pdf
L1: library part IND-10U-0001, "FIXED IND 10UH 6.5A 30 MOHM SMD", Current Rating=6.5A, Inductance=10uH, ComponentLink1Description=Datasheet, ComponentLink1URL=https://productfinder.pulseelectronics.com/api/open/part-attachments/datasheet/BMRF001010401R0MD1
L2: library part IND-8.2U-0001, "8.2 µH Shielded Molded Inductor 4 A 68mOhm Max Nonstandard", Current Rating=7.5A, Inductance=8.2uH, ComponentLink1Description=Datasheet, ComponentLink1URL=https://products.sumida.com/products/pdf/CDRH104.pdf
P1: "Header, 5-Pin", LatestRevisionDate=17-Jul-2002, LatestRevisionNote="Re-released for DXP Platform.", Publisher="Altium Limited"
Q1 Q2 Q3 Q4 Q5 Q6 Q7: library part NMOS-200MA-0001, "MOSFET N-CH 60V 200MA SOT23", Continuous Current=200mA, Voltage=60V, ComponentLink1Description=Datasheet, ComponentLink1URL=https://toshiba.semicon-storage.com/info/T2N7002AK_datasheet_en_20150401.pdf?did=29712&prodName=T2N7002AK
Q8 Q9 Q10: library part NMOS-34A-0001, "MOSFET N-CH 12 V 34A (Tc) 2.5W (Ta), 5.7W (Tc) Surface Mount 8-SOIC", Mfr_Name=Vishay, RefDes=RefDes, Type=Type
Q12: library part NMOS-60A-0001, "MOSFET N-CH 60V 12A/60A 8VSON", Continuous Current=60A, Voltage=60V, ComponentLink2Description=Datasheet, ComponentLink2URL=http://www.ti.com/lit/ds/symlink/csd18543q3a.pdf
R1 R2 R4 R6: library part RES-4.7k-0001, "RES 4.7K OHM 1% 1/10W 0603", Power=1/10W, Resistance=4.7k, Tolerance=1%, ComponentLink1Description=Datasheet, ComponentLink1URL=https://www.yageo.com/upload/media/product/products/datasheet/rchip/PYu-RC_Group_51_RoHS_L_12.pdf, Size=0603
R3 R27: library part RES-120-0001, "RES 120 OHM 1% 1/2W 1210", Power=1/2W, Resistance=120R, Tolerance=1%, ComponentLink1Description=Datasheet, ComponentLink1URL=https://www.yageo.com/upload/media/product/products/datasheet/rchip/PYu-RC_Group_51_RoHS_L_12.pdf, Size=1210
R5: library part RES-1k-0001, "RES 1K OHM 1% 1/16W 0402", Power=1/16W, Resistance=1k, Tolerance=1%, ComponentLink1Description=Datasheet, ComponentLink1URL=https://www.yageo.com/upload/media/product/products/datasheet/rchip/PYu-RC_Group_51_RoHS_L_12.pdf, Size=0402
R7: library part RES-147k-0001, "RES 147K OHM 1% 1/16W 0402", Power=1/16W, Resistance=147k, Tolerance=1%, ComponentLink1Description=Datasheet, ComponentLink1URL=https://www.yageo.com/upload/media/product/products/datasheet/rchip/PYu-RC_Group_51_RoHS_L_12.pdf, Size=0402
R8: library part RES-60.4k-0001, "RES 60.4K OHM 1% 1/16W 0402", Power=1/16W, Resistance=60.4k, Tolerance=1%, ComponentLink1Description=Datasheet, ComponentLink1URL=https://www.yageo.com/upload/media/product/products/datasheet/rchip/PYu-RC_Group_51_RoHS_L_12.pdf, Size=0402
R9: library part RES-158k-0001, "RES 158K OHM 1% 1/16W 0402", Power=1/16W, Resistance=158k, Tolerance=1%, ComponentLink1Description=Datasheet, ComponentLink1URL=https://www.yageo.com/upload/media/product/products/datasheet/rchip/PYu-RC_Group_51_RoHS_L_12.pdf, Size=0402
R10 R11 R12 R25: library part RES-10.5k-0001, "RES 10.5K OHM 1% 1/16W 0402", Power=1/16W, Resistance=10.5k, Tolerance=1%, ComponentLink1Description=Datasheet, ComponentLink1URL=https://www.yageo.com/upload/media/product/products/datasheet/rchip/PYu-RC_Group_51_RoHS_L_12.pdf, Size=0402
R13 R14 R15 R26 R29 R33 R34 R37: library part RES-100-0001, "RES 100 OHM 1% 1/16W 0402", Power=1/16W, Resistance=100R, Tolerance=1%, ComponentLink1Description=Datasheet, ComponentLink1URL=https://www.yageo.com/upload/media/product/products/datasheet/rchip/PYu-RC_Group_51_RoHS_L_12.pdf, Size=0402
R16: library part RES-80.6k-0001, "80.6 kOhms ±1% 0.063W, 1/16W Chip Resistor 0402 (1005 Metric) Moisture Resistant Thick Film", Power=1/16W, Resistance=80.6k, Tolerance=1%, ComponentLink1Description=Datasheet, ComponentLink1URL=https://www.yageo.com/upload/media/product/products/datasheet/rchip/PYu-RC_Group_51_RoHS_L_12.pdf, Size=0402
R17: library part RES-36.5k-0001, "36.5 kOhms ±1% 0.063W, 1/16W Chip Resistor 0402 (1005 Metric) Moisture Resistant Thick Film", Power=1/16W, Resistance=36.5k
R18 R24: library part RES-240-0001, "240R 0.063W 1% 0402 (1005 Metric)  SMD", Power=1/16W, Resistance=240R, Tolerance=1%, ComponentLink1Description=Datasheet, ComponentLink1URL=https://www.yageo.com/upload/media/product/products/datasheet/rchip/PYu-RC_Group_51_RoHS_L_12.pdf, Size=0402
R19 R23: library part RES-2.15M-0001, "RES SMD 2.15M OHM 1% 1/10W 0603", Power=1/10W, Resistance=2.15M, Tolerance=1%, ComponentLink1Description=Datasheet, ComponentLink1URL=https://www.yageo.com/upload/media/product/products/datasheet/rchip/PYu-RC_Group_51_RoHS_L_12.pdf, Size=0603
R20 R28 R42: library part RES-100k-0001, "RES SMD 100K OHM 1% 1/10W 0603", Power=100mW, Resistance=100k, Tolerance=1%, ComponentLink1Description=Datasheet, ComponentLink1URL=https://www.yageo.com/upload/media/product/products/datasheet/rchip/PYu-RC_Group_51_RoHS_L_12.pdf, Size=0603
R21: library part RES-178k-0001_1, "62.5mW Thick Film Resistors 50V ±100ppm/℃ ±1% 178kΩ 0402 Chip Resistor - Surface Mount ROHS", Power=1/16W, Resistance=178k, Tolerance=1%, ComponentLink1Description=Datasheet, ComponentLink1URL=https://www.lcsc.com/datasheet/lcsc_datasheet_2304140030_RALEC-RTT021783FTH_C102842.pdf, Size=0402
R22: library part RES-10.4k-0001, "10.4 kOhms ±0.1% 0.125W, 1/8W Chip Resistor 0805 (2012 Metric) Thin Film", Power=1/8W, Resistance=10.4k, Tolerance=1%, ComponentLink1Description=Datasheet, ComponentLink1URL=https://www.yageo.com/upload/media/product/products/datasheet/rchip/PYu-RC_Group_51_RoHS_L_12.pdf, Size=0402
R35 R36 R39: library part RES-33-0001, "RES 33 OHM 1% 1/8W 0402", Power=1/8W, Resistance=33R, Tolerance=1%, ComponentLink1Description=Datasheet, ComponentLink1URL=https://www.yageo.com/upload/media/product/products/datasheet/rchip/PYu-RC_Group_51_RoHS_L_12.pdf, Size=0402
R41: library part RES-200k-0001, "RES SMD 200K OHM 1% 1/10W 0603", Power=100mW, Resistance=200k, Tolerance=1%, ComponentLink1Description=Datasheet, ComponentLink1URL=https://www.yageo.com/upload/media/product/products/datasheet/rchip/PYu-RC_Group_51_RoHS_L_12.pdf, Size=0603
U1: library part IC-STM32G431CBT6, "IC MCU 32BIT 128KB FLASH 48LQFP", Package=48LQFP, ComponentLink1Description=Datasheet, ComponentLink1URL=https://www.st.com/resource/en/datasheet/stm32g431cb.pdf
U2 U3: library part IC-BUCK-0001, "IC REG BUCK ADJ 5A 10WSON", ComponentLink1Description=Datasheet, ComponentLink1URL=https://www.ti.com/general/docs/suppproductinfo.tsp?distId=10&gotoUrl=https%3A%2F%2Fwww.ti.com%2Flit%2Fgpn%2Ftps54561
U4: library part IC-CAN-0001, "IC TRANSCEIVER 1/1 8SOIC", ComponentLink1Description=Datasheet, ComponentLink1URL=https://www.ti.com/lit/ds/symlink/tcan1044-q1.pdf?HQS=dis-dk-null-digikeymode-dsf-pf-null-wwe&ts=1728758303289&ref_url=https%253A%252F%252Fwww.ti.com%252Fgeneral%252Fdocs%252Fsuppproductinfo.tsp%253FdistId%253D10%2526gotoUrl%253Dhttps%253A%252F%252Fwww.ti.com%252Flit%252Fgpn%252Ftcan1044-q1
X1 X2 X3 X4: library part "Micro-Fit Molex 3 Pin Vertical", Package=43650-0315, DeviceName=43650-0315, DeviceSetName=HEADER_POS3_?, GateName_1=G$1, LibraryName=con-molex-micro-fit-3_0_2, SymbolName_1=HEADER_POS3

## Free pads (board coordinates)
  round 250 hole 150: ""(1185,3200) ""(3590,945)

## Via types
v1: diameter 20, hole 8, Top Layer to Bottom Layer, 107 vias

## Nets (pads, with @x,y where several pads share a name; then routed paths per layer and width w, separated by ;. In a path a pad name is that pad's centre, name@x,y a point inside that pad or via, vN(x,y) a via of type N, cw(c..) or ccw(c..) an arc to the next point about the centre after c; other vN are vias at no path point)
3V3: 